# Altium PCB Backplane.PcbDoc (part 2 of 3)
Units mil, origin at the board's own origin, x right, y up, seen from the top; angles counter-clockwise.
Board outline 10300 x 6600 mil, 2 copper layers (Top Layer, Bottom Layer), stack 61.756 mil thick; 53 components, 149 nets, 1204 pads, 195 vias.
Unrouted connection lines stored in the file: 4.
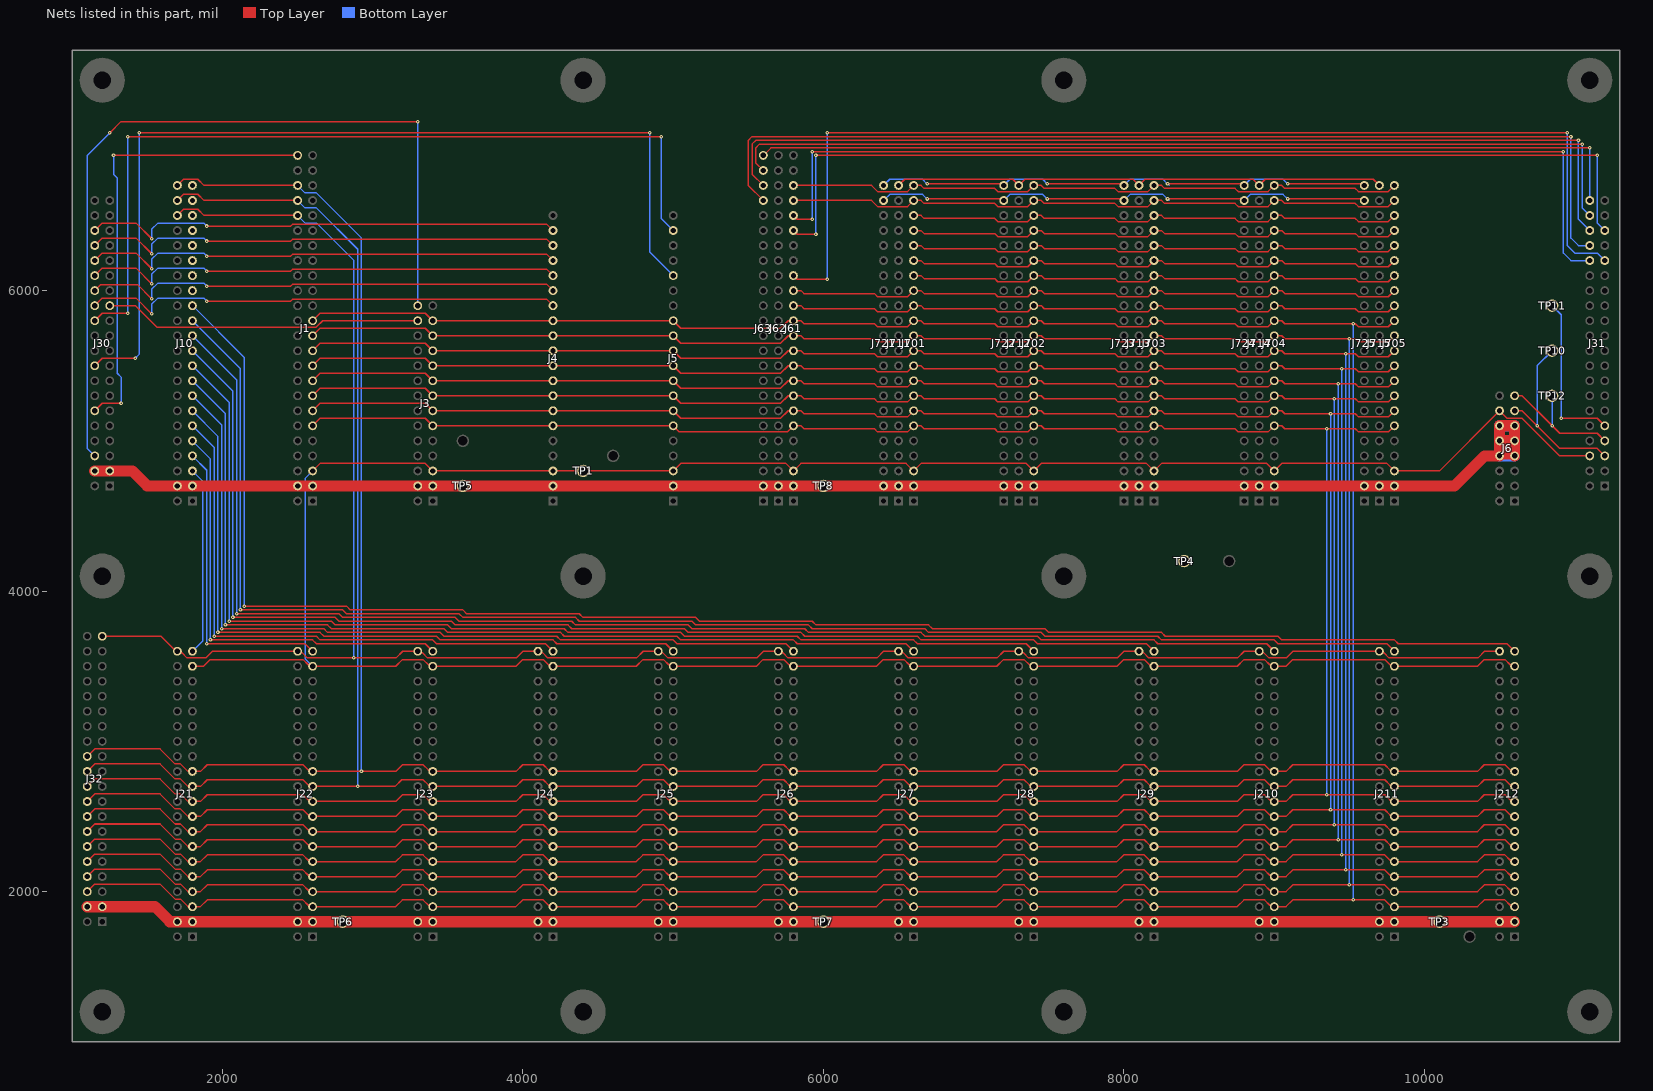
[diagram p2: the nets of this part, all layers, seen from the top]

## Via types
v1: diameter 24, hole 10, Top Layer to Bottom Layer, tented both sides, 195 vias

## Nets (pads, with @x,y where several pads share a name; then routed paths per layer and width w, separated by ;. In a path a pad name is that pad's centre, name@x,y a point inside that pad or via, vN(x,y) a via of type N, cw(c..) or ccw(c..) an arc to the next point about the centre after c; other vN are vias at no path point) (continued)
ADDR17: J1.40 J10.40 J21.40 J22.40 J23.40 J24.40 J25.40 J26.40 J27.40 J28.40 J29.40 J32.39 J210.40 J211.40 J212.40 | length 13724.9
  Top Layer w10: J32.39@1200,3700 1590,3700 1690,3600 J21.40@1700,3600 1709.39,3590.61 1729.39,3590.61 1764.53,3555.47 1889.07,3555.47 1933.6,3600 J22.40@2500,3600 2509.39,3590.61 2529.39,3590.61 2564.53,3555.47 3155.47,3555.47 3200,3600 J23.40@3300,3600 3309.39,3590.61 3329.39,3590.61 3364.53,3555.47 3955.47,3555.47 4000,3600 J24.40@4100,3600 4109.39,3590.61 4129.39,3590.61 4164.53,3555.47 4755.47,3555.47 4800,3600 J25.40@4900,3600 4909.39,3590.61 4929.39,3590.61 4964.53,3555.47 5555.47,3555.47 5600,3600 J26.40@5700,3600 5709.39,3590.61 5729.39,3590.61 5764.53,3555.47 6355.47,3555.47 6400,3600 J27.40@6500,3600 6509.39,3590.61 6529.39,3590.61 6564.53,3555.47 7155.47,3555.47 7200,3600 J28.40@7300,3600 7309.39,3590.61 7329.39,3590.61 7364.53,3555.47 7955.47,3555.47 8000,3600 J29.40@8100,3600 8109.39,3590.61 8129.39,3590.61 8164.53,3555.47 8755.47,3555.47 8800,3600 J210.40@8900,3600 8909.39,3590.61 8929.39,3590.61 8964.53,3555.47 9080.47,3555.47 9125,3600 J211.40@9700,3600 9709.39,3590.61 9729.39,3590.61 9764.53,3555.47 10355.47,3555.47 10400,3600 J212.40@10500,3600 ; J10.40@1700,6500 1741,6541 1836,6541 1877,6500 J1.40@2500,6500
  Bottom Layer w10: J1.40@2500,6500 2550,6450 2625,6450 2875,6200 v1(2875,3555.47)
ADDR18: J1.42 J10.42 J21.21 J22.21 J23.21 J24.21 J25.21 J26.21 J27.21 J28.21 J29.21 J32.22 J210.21 J211.21 J212.21 | length 14930.3
  Top Layer w10: J32.22@1100,2800 1150,2850 1585,2850 1685,2750 1720,2750 1770,2700 J21.21@1800,2700 1853.6,2700 1898.12,2744.53 ; J10.42@1700,6600 1741,6641 1836,6641 1877,6600 J1.42@2500,6600 ; 1900,2744.53 2535.47,2744.53 2570.61,2709.39 2590.61,2709.39 J22.21@2600,2700 v1(2900,2700) 3149.07,2700 3193.59,2744.53 3335.47,2744.53 3370.61,2709.39 3390.61,2709.39 J23.21@3400,2700 3953.6,2700 3998.12,2744.53 4135.47,2744.53 4170.61,2709.39 4190.61,2709.39 J24.21@4200,2700 4753.6,2700 4798.12,2744.53 4935.47,2744.53 4970.61,2709.39 4990.61,2709.39 J25.21@5000,2700 5553.6,2700 5598.12,2744.53 5735.47,2744.53 5770.61,2709.39 5790.61,2709.39 J26.21@5800,2700 6353.6,2700 6398.12,2744.53 6535.47,2744.53 6570.61,2709.39 6590.61,2709.39 J27.21@6600,2700 7153.6,2700 7198.12,2744.53 7335.47,2744.53 7370.61,2709.39 7390.61,2709.39 J28.21@7400,2700 7953.6,2700 7998.12,2744.53 8135.47,2744.53 8170.61,2709.39 8190.61,2709.39 J29.21@8200,2700 8753.6,2700 8798.12,2744.53 8935.47,2744.53 8970.61,2709.39 8990.61,2709.39 J210.21@9000,2700 9078.6,2700 9123.12,2744.53 9735.47,2744.53 9770.61,2709.39 9790.61,2709.39 J211.21@9800,2700 10353.6,2700 10398.12,2744.53 10535.47,2744.53 10570.61,2709.39 10590.61,2709.39 J212.21@10600,2700
  Bottom Layer w10: J1.42@2500,6600 2550,6550 2625,6550 2900,6275 v1(2900,2700)
ADDR19: J1.44 J10.44 J21.23 J22.23 J23.23 J24.23 J25.23 J26.23 J27.23 J28.23 J29.23 J32.24 J210.23 J211.23 J212.23 | length 14940.7
  Top Layer w10: J32.24@1100,2900 1150,2950 1585,2950 1685,2850 1720,2850 1770,2800 J21.23@1800,2800 1853.6,2800 1898.12,2844.53 ; J10.44@1700,6700 1741,6741 1836,6741 1877,6700 J1.44@2500,6700 ; 1900,2844.53 2535.47,2844.53 2570.61,2809.39 2590.61,2809.39 J22.23@2600,2800 v1(2925,2800) 3153.6,2800 3198.12,2844.53 3335.47,2844.53 3370.61,2809.39 3390.61,2809.39 J23.23@3400,2800 3953.6,2800 3998.12,2844.53 4135.47,2844.53 4170.61,2809.39 4190.61,2809.39 J24.23@4200,2800 4753.6,2800 4798.12,2844.53 4935.47,2844.53 4970.61,2809.39 4990.61,2809.39 J25.23@5000,2800 5553.6,2800 5598.12,2844.53 5735.47,2844.53 5770.61,2809.39 5790.61,2809.39 J26.23@5800,2800 6353.6,2800 6398.12,2844.53 6535.47,2844.53 6570.61,2809.39 6590.61,2809.39 J27.23@6600,2800 7153.6,2800 7198.12,2844.53 7335.47,2844.53 7370.61,2809.39 7390.61,2809.39 J28.23@7400,2800 7953.6,2800 7998.12,2844.53 8135.47,2844.53 8170.61,2809.39 8190.61,2809.39 J29.23@8200,2800 8753.6,2800 8798.12,2844.53 8935.47,2844.53 8970.61,2809.39 8990.61,2809.39 J210.23@9000,2800 9078.6,2800 9123.12,2844.53 9735.47,2844.53 9770.61,2809.39 9790.61,2809.39 J211.23@9800,2800 10353.6,2800 10398.12,2844.53 10535.47,2844.53 10570.61,2809.39 10590.61,2809.39 J212.23@10600,2800
  Bottom Layer w10: J1.44@2500,6700 2550,6650 2625,6650 2925,6350 v1(2925,2800)
AI#: J4.14 J30.26 | length 3225.6
  Top Layer w10: J30.26@1150,5900 1200,5950 1425,5950 v1(1530,5845) ; v1(1895,5930) 2455,5930 2466,5941 4159,5941 J4.14@4200,5900
  Bottom Layer w10: v1(1530,5845) 1530,5910 1570,5950 1875,5950 v1(1895,5930)
ALU0: J31.34 J63.21 | length 6747.5
  Top Layer w10: J63.21@5600,6600 5500,6700 5500,7000 5525,7025 v1(10975,7025)
  Bottom Layer w10: v1(10975,7025) 10975,6350 11025,6300 J31.34@11100,6300
ALU1: J31.36 J63.22 | length 6447.5
  Top Layer w10: J63.22@5600,6700 5525,6775 5525,6975 5550,7000 v1(11025,7000)
  Bottom Layer w10: v1(11025,7000) 11025,6475 J31.36@11100,6400
ALU2: J31.38 J63.23 | length 6176.8
  Top Layer w10: J63.23@5600,6800 5550,6850 5550,6950 5575,6975 v1(11050,6975)
  Bottom Layer w10: v1(11050,6975) 11050,6550 J31.38@11100,6500
ALU3: J31.40 J63.24 | length 5870.7
  Top Layer w10: J63.24@5600,6900 5650,6950 v1(11100,6950)
  Bottom Layer w10: J31.40@11100,6600 v1(11100,6950)
ALU_RFU16: J701.16 J702.16 J703.16 J704.16 J705.16 | length 3334.3
  Top Layer w10: J701.16@6600,6100 6650,6100 6670,6080 7140,6080 7160.53,6059.47 7359.47,6059.47 J702.16@7400,6100 7450,6100 7470,6080 7940,6080 7960.53,6059.47 8159.47,6059.47 J703.16@8200,6100 8250,6100 8270,6080 8740,6080 8760.53,6059.47 8959.47,6059.47 J704.16@9000,6100 9050,6100 9070,6080 9540,6080 9560.53,6059.47 9759.47,6059.47 J705.16@9800,6100
ALU_RFU17: J701.17 J702.17 J703.17 J704.17 J705.17 | length 3334.3
  Top Layer w10: J701.17@6600,6200 6650,6200 6670,6180 7140,6180 7160.53,6159.47 7359.47,6159.47 J702.17@7400,6200 7450,6200 7470,6180 7940,6180 7960.53,6159.47 8159.47,6159.47 J703.17@8200,6200 8250,6200 8270,6180 8740,6180 8760.53,6159.47 8959.47,6159.47 J704.17@9000,6200 9050,6200 9070,6180 9540,6180 9560.53,6159.47 9759.47,6159.47 J705.17@9800,6200
ALU_RFU18: J701.18 J702.18 J703.18 J704.18 J705.18 | length 3334.3
  Top Layer w10: J701.18@6600,6300 6650,6300 6670,6280 7140,6280 7160.53,6259.47 7359.47,6259.47 J702.18@7400,6300 7450,6300 7470,6280 7940,6280 7960.53,6259.47 8159.47,6259.47 J703.18@8200,6300 8250,6300 8270,6280 8740,6280 8760.53,6259.47 8959.47,6259.47 J704.18@9000,6300 9050,6300 9070,6280 9540,6280 9560.53,6259.47 9759.47,6259.47 J705.18@9800,6300
ALU_RFU19: J701.19 J702.19 J703.19 J704.19 J705.19 | length 3334.3
  Top Layer w10: J701.19@6600,6400 6650,6400 6670,6380 7140,6380 7160.53,6359.47 7359.47,6359.47 J702.19@7400,6400 7450,6400 7470,6380 7940,6380 7960.53,6359.47 8159.47,6359.47 J703.19@8200,6400 8250,6400 8270,6380 8740,6380 8760.53,6359.47 8959.47,6359.47 J704.19@9000,6400 9050,6400 9070,6380 9540,6380 9560.53,6359.47 9759.47,6359.47 J705.19@9800,6400
ALU_RFU20: J701.20 J702.20 J703.20 J704.20 J705.20 | length 3334.3
  Top Layer w10: J701.20@6600,6500 6650,6500 6670,6480 7140,6480 7160.53,6459.47 7359.47,6459.47 J702.20@7400,6500 7450,6500 7470,6480 7940,6480 7960.53,6459.47 8159.47,6459.47 J703.20@8200,6500 8250,6500 8270,6480 8740,6480 8760.53,6459.47 8959.47,6459.47 J704.20@9000,6500 9050,6500 9070,6480 9540,6480 9560.53,6459.47 9759.47,6459.47 J705.20@9800,6500
ALU_RFU21: J61.21 J701.21 J702.21 J703.21 J704.21 J705.21 | length 4167.9
  Top Layer w10: J61.21@5800,6600 6320,6600 6360.53,6559.47 6559.47,6559.47 J701.21@6600,6600 6650,6600 6670,6580 7140,6580 7160.53,6559.47 7359.47,6559.47 J702.21@7400,6600 7450,6600 7470,6580 7940,6580 7960.53,6559.47 8159.47,6559.47 J703.21@8200,6600 8250,6600 8270,6580 8740,6580 8760.53,6559.47 8959.47,6559.47 J704.21@9000,6600 9050,6600 9070,6580 9540,6580 9560.53,6559.47 9759.47,6559.47 J705.21@9800,6600
ALU_RFU22: J61.22 J701.22 J702.22 J703.22 J704.22 J705.22 | length 4167.9
  Top Layer w10: J61.22@5800,6700 6320,6700 6360.53,6659.47 6559.47,6659.47 J701.22@6600,6700 6650,6700 6670,6680 7140,6680 7160.53,6659.47 7359.47,6659.47 J702.22@7400,6700 7450,6700 7470,6680 7940,6680 7960.53,6659.47 8159.47,6659.47 J703.22@8200,6700 8250,6700 8270,6680 8740,6680 8760.53,6659.47 8959.47,6659.47 J704.22@9000,6700 9050,6700 9070,6680 9540,6680 9560.53,6659.47 9759.47,6659.47 J705.22@9800,6700
ALU_RFU44: J711.22 J712.22 J713.22 J714.22 J715.22 | length 3334.3
  Top Layer w10: J711.22@6500,6700 6540.53,6740.53 7259.47,6740.53 J712.22@7300,6700 7340.53,6740.53 8059.47,6740.53 J713.22@8100,6700 8140.53,6740.53 8859.47,6740.53 J714.22@8900,6700 8940.53,6740.53 9659.47,6740.53 J715.22@9700,6700
ALU_RFU65: J721.21 J722.21 J723.21 J724.21 J725.21 | length 3334.3
  Top Layer w10: v1(6690,6610) 7190,6610 J722.21@7200,6600 ; v1(7490,6610) 7990,6610 J723.21@8000,6600 ; v1(8290,6610) 8790,6610 J724.21@8800,6600 ; v1(9090,6610) 9590,6610 J725.21@9600,6600
  Bottom Layer w10: J721.21@6400,6600 6440.53,6640.53 6659.47,6640.53 v1(6690,6610) ; J722.21@7200,6600 7240.53,6640.53 7459.47,6640.53 v1(7490,6610) ; J723.21@8000,6600 8040.53,6640.53 8259.47,6640.53 v1(8290,6610) ; J724.21@8800,6600 8840.53,6640.53 9059.47,6640.53 v1(9090,6610)
ALU_RFU66: J721.22 J722.22 J723.22 J724.22 J725.22 | length 3334.3
  Top Layer w10: v1(6690,6710) 7190,6710 J722.22@7200,6700 ; v1(7490,6710) 7990,6710 J723.22@8000,6700 ; v1(8290,6710) 8790,6710 J724.22@8800,6700 ; v1(9090,6710) 9590,6710 J725.22@9600,6700
  Bottom Layer w10: J721.22@6400,6700 6440.53,6740.53 6659.47,6740.53 v1(6690,6710) ; J722.22@7200,6700 7240.53,6740.53 7459.47,6740.53 v1(7490,6710) ; J723.22@8000,6700 8040.53,6740.53 8259.47,6740.53 v1(8290,6710) ; J724.22@8800,6700 8840.53,6740.53 9059.47,6740.53 v1(9090,6710)
AO#: J4.17 J30.32 | length 3225.6
  Top Layer w10: J30.32@1150,6200 1200,6250 1425,6250 v1(1530,6145) ; v1(1895,6230) 2455,6230 2466,6241 4159,6241 J4.17@4200,6200
  Bottom Layer w10: v1(1530,6145) 1530,6210 1570,6250 1875,6250 v1(1895,6230)
AT#: J31.9 TP11.1 | length 1085.6
  Top Layer w10: v1(10910,5150) 11150,5150 J31.9@11200,5100
  Bottom Layer w10: TP11.1@10850,5900 10910,5840 v1(10910,5150)
BI#: J4.15 J30.28 | length 3217.4
  Top Layer w10: J30.28@1150,6000 1190,6040 1243.48,6040 cw(c1250,6000) 1256.52,6040 1435,6040 v1(1530,5945) ; v1(1895,6030) 2455,6030 2466,6041 4159,6041 J4.15@4200,6000
  Bottom Layer w10: v1(1530,5945) 1530,6010 1570,6050 1875,6050 v1(1895,6030)
BO#: J4.18 J30.34 | length 3225.6
  Top Layer w10: J30.34@1150,6300 1200,6350 1425,6350 v1(1530,6245) ; v1(1895,6330) 2455,6330 2466,6341 4159,6341 J4.18@4200,6300
  Bottom Layer w10: v1(1530,6245) 1530,6310 1570,6350 1875,6350 v1(1895,6330)
BUS0: J1.25 J3.25 J4.13 J5.13 J21.5 J22.5 J23.5 J24.5 J25.5 J26.5 J27.5 J28.5 J29.5 J32.6 J61.13 J210.5 J211.5 J212.5 J701.13 J702.13 J703.13 J704.13 J705.13 | length 21272.2
  Top Layer w10: J32.6@1100,2000 1150,2050 1585,2050 1685,1950 1720,1950 1770,1900 J21.5@1800,1900 1853.6,1900 1898.12,1944.53 ; 1900,1944.53 2535.47,1944.53 2570.61,1909.39 2590.61,1909.39 J22.5@2600,1900 3153.6,1900 3198.12,1944.53 3335.47,1944.53 3370.61,1909.39 3390.61,1909.39 J23.5@3400,1900 3953.6,1900 3998.12,1944.53 4135.47,1944.53 4170.61,1909.39 4190.61,1909.39 J24.5@4200,1900 4753.6,1900 4798.12,1944.53 4935.47,1944.53 4970.61,1909.39 4990.61,1909.39 J25.5@5000,1900 5553.6,1900 5598.12,1944.53 5735.47,1944.53 5770.61,1909.39 5790.61,1909.39 J26.5@5800,1900 6353.6,1900 6398.12,1944.53 6535.47,1944.53 6570.61,1909.39 6590.61,1909.39 J27.5@6600,1900 7153.6,1900 7198.12,1944.53 7335.47,1944.53 7370.61,1909.39 7390.61,1909.39 J28.5@7400,1900 7953.6,1900 7998.12,1944.53 8135.47,1944.53 8170.61,1909.39 8190.61,1909.39 J29.5@8200,1900 8753.6,1900 8798.12,1944.53 8935.47,1944.53 8970.61,1909.39 8990.61,1909.39 J210.5@9000,1900 9078.6,1900 9123.12,1944.53 v1(9525,1944.53) 9735.47,1944.53 9770.61,1909.39 9790.61,1909.39 J211.5@9800,1900 10353.6,1900 10398.12,1944.53 10535.47,1944.53 10570.61,1909.39 10590.61,1909.39 J212.5@10600,1900 ; J1.25@2600,5800 2650,5850 3350,5850 J3.25@3400,5800 J4.13@4200,5800 J5.13@5000,5800 5050,5750 5715,5750 5765,5800 J61.13@5800,5800 5850,5800 5870,5780 6340,5780 6360.53,5759.47 6559.47,5759.47 J701.13@6600,5800 6650,5800 6670,5780 7140,5780 7160.53,5759.47 7359.47,5759.47 J702.13@7400,5800 7450,5800 7470,5780 7940,5780 7960.53,5759.47 8159.47,5759.47 J703.13@8200,5800 8250,5800 8270,5780 8740,5780 8760.53,5759.47 8959.47,5759.47 J704.13@9000,5800 9050,5800 9070,5780 v1(9525,5780) 9540,5780 9560.53,5759.47 9759.47,5759.47 J705.13@9800,5800
  Bottom Layer w10: v1@9525,1945.22 v1(9525,5780)
BUS1: J1.23 J3.23 J4.12 J5.12 J21.7 J22.7 J23.7 J24.7 J25.7 J26.7 J27.7 J28.7 J29.7 J32.8 J61.12 J210.7 J211.7 J212.7 J701.12 J702.12 J703.12 J704.12 J705.12 | length 21072.2
  Top Layer w10: J32.8@1100,2100 1150,2150 1585,2150 1685,2050 1720,2050 1770,2000 J21.7@1800,2000 1853.6,2000 1898.12,2044.53 ; 1900,2044.53 2535.47,2044.53 2570.61,2009.39 2590.61,2009.39 J22.7@2600,2000 3153.6,2000 3198.12,2044.53 3335.47,2044.53 3370.61,2009.39 3390.61,2009.39 J23.7@3400,2000 3953.6,2000 3998.12,2044.53 4135.47,2044.53 4170.61,2009.39 4190.61,2009.39 J24.7@4200,2000 4753.6,2000 4798.12,2044.53 4935.47,2044.53 4970.61,2009.39 4990.61,2009.39 J25.7@5000,2000 5553.6,2000 5598.12,2044.53 5735.47,2044.53 5770.61,2009.39 5790.61,2009.39 J26.7@5800,2000 6353.6,2000 6398.12,2044.53 6535.47,2044.53 6570.61,2009.39 6590.61,2009.39 J27.7@6600,2000 7153.6,2000 7198.12,2044.53 7335.47,2044.53 7370.61,2009.39 7390.61,2009.39 J28.7@7400,2000 7953.6,2000 7998.12,2044.53 8135.47,2044.53 8170.61,2009.39 8190.61,2009.39 J29.7@8200,2000 8753.6,2000 8798.12,2044.53 8935.47,2044.53 8970.61,2009.39 8990.61,2009.39 J210.7@9000,2000 9078.6,2000 9123.12,2044.53 v1(9500,2044.53) 9735.47,2044.53 9770.61,2009.39 9790.61,2009.39 J211.7@9800,2000 10353.6,2000 10398.12,2044.53 10535.47,2044.53 10570.61,2009.39 10590.61,2009.39 J212.7@10600,2000 ; J1.23@2600,5700 2650,5750 3350,5750 J3.23@3400,5700 J4.12@4200,5700 J5.12@5000,5700 5050,5650 5715,5650 5765,5700 J61.12@5800,5700 5850,5700 5870,5680 6340,5680 6360.53,5659.47 6559.47,5659.47 J701.12@6600,5700 6650,5700 6670,5680 7140,5680 7160.53,5659.47 7359.47,5659.47 J702.12@7400,5700 7450,5700 7470,5680 7940,5680 7960.53,5659.47 8159.47,5659.47 J703.12@8200,5700 8250,5700 8270,5680 8740,5680 8760.53,5659.47 8959.47,5659.47 J704.12@9000,5700 9050,5700 9070,5680 v1(9500,5680) 9540,5680 9560.53,5659.47 9759.47,5659.47 J705.12@9800,5700
  Bottom Layer w10: v1@9500,2045.22 v1(9500,5680)
BUS2: J1.21 J3.21 J4.11 J5.11 J21.9 J22.9 J23.9 J24.9 J25.9 J26.9 J27.9 J28.9 J29.9 J32.10 J61.11 J210.9 J211.9 J212.9 J701.11 J702.11 J703.11 J704.11 J705.11 | length 20872.2
  Top Layer w10: J32.10@1100,2200 1150,2250 1585,2250 1685,2150 1720,2150 1770,2100 J21.9@1800,2100 1853.6,2100 1898.12,2144.53 ; 1900,2144.53 2535.47,2144.53 2570.61,2109.39 2590.61,2109.39 J22.9@2600,2100 3153.6,2100 3198.12,2144.53 3335.47,2144.53 3370.61,2109.39 3390.61,2109.39 J23.9@3400,2100 3953.6,2100 3998.12,2144.53 4135.47,2144.53 4170.61,2109.39 4190.61,2109.39 J24.9@4200,2100 4753.6,2100 4798.12,2144.53 4935.47,2144.53 4970.61,2109.39 4990.61,2109.39 J25.9@5000,2100 5553.6,2100 5598.12,2144.53 5735.47,2144.53 5770.61,2109.39 5790.61,2109.39 J26.9@5800,2100 6353.6,2100 6398.12,2144.53 6535.47,2144.53 6570.61,2109.39 6590.61,2109.39 J27.9@6600,2100 7153.6,2100 7198.12,2144.53 7335.47,2144.53 7370.61,2109.39 7390.61,2109.39 J28.9@7400,2100 7953.6,2100 7998.12,2144.53 8135.47,2144.53 8170.61,2109.39 8190.61,2109.39 J29.9@8200,2100 8753.6,2100 8798.12,2144.53 8935.47,2144.53 8970.61,2109.39 8990.61,2109.39 J210.9@9000,2100 9078.6,2100 9123.12,2144.53 v1(9475,2144.53) 9735.47,2144.53 9770.61,2109.39 9790.61,2109.39 J211.9@9800,2100 10353.6,2100 10398.12,2144.53 10535.47,2144.53 10570.61,2109.39 10590.61,2109.39 J212.9@10600,2100 ; J1.21@2600,5600 2650,5650 3350,5650 J3.21@3400,5600 J4.11@4200,5600 J5.11@5000,5600 5050,5550 5715,5550 5765,5600 J61.11@5800,5600 5850,5600 5870,5580 6340,5580 6360.53,5559.47 6559.47,5559.47 J701.11@6600,5600 6650,5600 6670,5580 7140,5580 7160.53,5559.47 7359.47,5559.47 J702.11@7400,5600 7450,5600 7470,5580 7940,5580 7960.53,5559.47 8159.47,5559.47 J703.11@8200,5600 8250,5600 8270,5580 8740,5580 8760.53,5559.47 8959.47,5559.47 J704.11@9000,5600 9050,5600 9070,5580 v1(9475,5580) 9540,5580 9560.53,5559.47 9759.47,5559.47 J705.11@9800,5600
  Bottom Layer w10: v1@9475,2145.22 v1(9475,5580)
BUS3: J1.19 J3.19 J4.10 J5.10 J21.11 J22.11 J23.11 J24.11 J25.11 J26.11 J27.11 J28.11 J29.11 J32.12 J61.10 J210.11 J211.11 J212.11 J701.10 J702.10 J703.10 J704.10 J705.10 | length 20672.2
  Top Layer w10: J32.12@1100,2300 1150,2350 1585,2350 1685,2250 1720,2250 1770,2200 J21.11@1800,2200 1853.6,2200 1898.12,2244.53 ; 1900,2244.53 2535.47,2244.53 2570.61,2209.39 2590.61,2209.39 J22.11@2600,2200 3153.6,2200 3198.12,2244.53 3335.47,2244.53 3370.61,2209.39 3390.61,2209.39 J23.11@3400,2200 3953.6,2200 3998.12,2244.53 4135.47,2244.53 4170.61,2209.39 4190.61,2209.39 J24.11@4200,2200 4753.6,2200 4798.12,2244.53 4935.47,2244.53 4970.61,2209.39 4990.61,2209.39 J25.11@5000,2200 5553.6,2200 5598.12,2244.53 5735.47,2244.53 5770.61,2209.39 5790.61,2209.39 J26.11@5800,2200 6353.6,2200 6398.12,2244.53 6535.47,2244.53 6570.61,2209.39 6590.61,2209.39 J27.11@6600,2200 7153.6,2200 7198.12,2244.53 7335.47,2244.53 7370.61,2209.39 7390.61,2209.39 J28.11@7400,2200 7953.6,2200 7998.12,2244.53 8135.47,2244.53 8170.61,2209.39 8190.61,2209.39 J29.11@8200,2200 8753.6,2200 8798.12,2244.53 8935.47,2244.53 8970.61,2209.39 8990.61,2209.39 J210.11@9000,2200 9078.6,2200 9123.12,2244.53 v1(9450,2244.53) 9735.47,2244.53 9770.61,2209.39 9790.61,2209.39 J211.11@9800,2200 10353.6,2200 10398.12,2244.53 10535.47,2244.53 10570.61,2209.39 10590.61,2209.39 J212.11@10600,2200 ; J1.19@2600,5500 2650,5550 3350,5550 J3.19@3400,5500 J4.10@4200,5500 J5.10@5000,5500 5050,5450 5715,5450 5765,5500 J61.10@5800,5500 5850,5500 5870,5480 6340,5480 6360.53,5459.47 6559.47,5459.47 J701.10@6600,5500 6650,5500 6670,5480 7140,5480 7160.53,5459.47 7359.47,5459.47 J702.10@7400,5500 7450,5500 7470,5480 7940,5480 7960.53,5459.47 8159.47,5459.47 J703.10@8200,5500 8250,5500 8270,5480 8740,5480 8760.53,5459.47 8959.47,5459.47 J704.10@9000,5500 9050,5500 9070,5480 v1(9450,5480) 9540,5480 9560.53,5459.47 9759.47,5459.47 J705.10@9800,5500
  Bottom Layer w10: v1@9450,2245.22 v1(9450,5480)
BUS4: J1.17 J3.17 J4.9 J5.9 J21.13 J22.13 J23.13 J24.13 J25.13 J26.13 J27.13 J28.13 J29.13 J32.14 J61.9 J210.13 J211.13 J212.13 J701.9 J702.9 J703.9 J704.9 J705.9 | length 20472.9
  Top Layer w10: J32.14@1100,2400 1150,2450 1585,2450 1685,2350 1720,2350 1770,2300 J21.13@1800,2300 1853.6,2300 1898.12,2344.53 ; 1900,2344.53 2535.47,2344.53 2570.61,2309.39 2590.61,2309.39 J22.13@2600,2300 3153.6,2300 3198.12,2344.53 3335.47,2344.53 3370.61,2309.39 3390.61,2309.39 J23.13@3400,2300 3953.6,2300 3998.12,2344.53 4135.47,2344.53 4170.61,2309.39 4190.61,2309.39 J24.13@4200,2300 4753.6,2300 4798.12,2344.53 4935.47,2344.53 4970.61,2309.39 4990.61,2309.39 J25.13@5000,2300 5553.6,2300 5598.12,2344.53 5735.47,2344.53 5770.61,2309.39 5790.61,2309.39 J26.13@5800,2300 6353.6,2300 6398.12,2344.53 6535.47,2344.53 6570.61,2309.39 6590.61,2309.39 J27.13@6600,2300 7153.6,2300 7198.12,2344.53 7335.47,2344.53 7370.61,2309.39 7390.61,2309.39 J28.13@7400,2300 7953.6,2300 7998.12,2344.53 8135.47,2344.53 8170.61,2309.39 8190.61,2309.39 J29.13@8200,2300 8753.6,2300 8798.12,2344.53 8935.47,2344.53 8970.61,2309.39 8990.61,2309.39 J210.13@9000,2300 9078.6,2300 9123.12,2344.53 v1(9425,2344.53) 9735.47,2344.53 9770.61,2309.39 9790.61,2309.39 J211.13@9800,2300 10353.6,2300 10398.12,2344.53 10535.47,2344.53 10570.61,2309.39 10590.61,2309.39 J212.13@10600,2300 ; J1.17@2600,5400 2650,5450 3350,5450 J3.17@3400,5400 J4.9@4200,5400 J5.9@5000,5400 5050,5350 5715,5350 5765,5400 J61.9@5800,5400 5850,5400 5870,5380 6340,5380 6360.53,5359.47 6559.47,5359.47 J701.9@6600,5400 6650,5400 6670,5380 7140,5380 7160.53,5359.47 7359.47,5359.47 J702.9@7400,5400 7450,5400 7470,5380 7940,5380 7960.53,5359.47 8159.47,5359.47 J703.9@8200,5400 8250,5400 8270,5380 8740,5380 8760.53,5359.47 8959.47,5359.47 J704.9@9000,5400 9050,5400 9070,5380 v1(9425,5380) 9540,5380 9560.53,5359.47 9759.47,5359.47 J705.9@9800,5400
  Bottom Layer w10: v1(9425,2344.53) v1(9425,5380)
BUS5: J1.15 J3.15 J4.8 J5.8 J21.15 J22.15 J23.15 J24.15 J25.15 J26.15 J27.15 J28.15 J29.15 J32.16 J61.8 J210.15 J211.15 J212.15 J701.8 J702.8 J703.8 J704.8 J705.8 | length 20270.3
  Top Layer w10: J32.16@1100,2500 1150,2550 1585,2550 1685,2450 1720,2450 1770,2400 J21.15@1800,2400 1853.6,2400 1898.12,2444.53 ; 1900,2444.53 2535.47,2444.53 2570.61,2409.39 2590.61,2409.39 J22.15@2600,2400 3153.6,2400 3198.12,2444.53 3335.47,2444.53 3370.61,2409.39 3390.61,2409.39 J23.15@3400,2400 3953.6,2400 3998.12,2444.53 4135.47,2444.53 4170.61,2409.39 4190.61,2409.39 J24.15@4200,2400 4753.6,2400 4798.12,2444.53 4935.47,2444.53 4970.61,2409.39 4990.61,2409.39 J25.15@5000,2400 5553.6,2400 5598.12,2444.53 5735.47,2444.53 5770.61,2409.39 5790.61,2409.39 J26.15@5800,2400 6353.6,2400 6398.12,2444.53 6535.47,2444.53 6570.61,2409.39 6590.61,2409.39 J27.15@6600,2400 7153.6,2400 7198.12,2444.53 7335.47,2444.53 7370.61,2409.39 7390.61,2409.39 J28.15@7400,2400 7953.6,2400 7998.12,2444.53 8135.47,2444.53 8170.61,2409.39 8190.61,2409.39 J29.15@8200,2400 8753.6,2400 8798.12,2444.53 8935.47,2444.53 8970.61,2409.39 8990.61,2409.39 J210.15@9000,2400 9078.6,2400 9123.12,2444.53 v1(9400,2444.53) 9735.47,2444.53 9770.61,2409.39 9790.61,2409.39 J211.15@9800,2400 10353.6,2400 10398.12,2444.53 10535.47,2444.53 10570.61,2409.39 10590.61,2409.39 J212.15@10600,2400 ; J1.15@2600,5300 2650,5350 3350,5350 J3.15@3400,5300 J4.8@4200,5300 J5.8@5000,5300 5050,5250 5715,5250 5765,5300 J61.8@5800,5300 5850,5300 5870,5280 6340,5280 6360.53,5259.47 6559.47,5259.47 J701.8@6600,5300 6650,5300 6670,5280 7140,5280 7160.53,5259.47 7359.47,5259.47 J702.8@7400,5300 7450,5300 7470,5280 7940,5280 7960.53,5259.47 8159.47,5259.47 J703.8@8200,5300 8250,5300 8270,5280 8740,5280 8760.53,5259.47 8959.47,5259.47 J704.8@9000,5300 9050,5300 9070,5280 v1(9400,5280) 9540,5280 9560.53,5259.47 9759.47,5259.47 J705.8@9800,5300
  Bottom Layer w10: v1@9400,2447.11 v1(9400,5280)
BUS6: J1.13 J3.13 J4.7 J5.7 J21.17 J22.17 J23.17 J24.17 J25.17 J26.17 J27.17 J28.17 J29.17 J32.18 J61.7 J210.17 J211.17 J212.17 J701.7 J702.7 J703.7 J704.7 J705.7 | length 20072.2
  Top Layer w10: J32.18@1100,2600 1150,2650 1585,2650 1685,2550 1720,2550 1770,2500 J21.17@1800,2500 1853.6,2500 1898.12,2544.53 ; 1900,2544.53 2535.47,2544.53 2570.61,2509.39 2590.61,2509.39 J22.17@2600,2500 3153.6,2500 3198.12,2544.53 3335.47,2544.53 3370.61,2509.39 3390.61,2509.39 J23.17@3400,2500 3953.6,2500 3998.12,2544.53 4135.47,2544.53 4170.61,2509.39 4190.61,2509.39 J24.17@4200,2500 4753.6,2500 4798.12,2544.53 4935.47,2544.53 4970.61,2509.39 4990.61,2509.39 J25.17@5000,2500 5553.6,2500 5598.12,2544.53 5735.47,2544.53 5770.61,2509.39 5790.61,2509.39 J26.17@5800,2500 6353.6,2500 6398.12,2544.53 6535.47,2544.53 6570.61,2509.39 6590.61,2509.39 J27.17@6600,2500 7153.6,2500 7198.12,2544.53 7335.47,2544.53 7370.61,2509.39 7390.61,2509.39 J28.17@7400,2500 7953.6,2500 7998.12,2544.53 8135.47,2544.53 8170.61,2509.39 8190.61,2509.39 J29.17@8200,2500 8753.6,2500 8798.12,2544.53 8935.47,2544.53 8970.61,2509.39 8990.61,2509.39 J210.17@9000,2500 9078.6,2500 9123.12,2544.53 v1(9375,2544.53) 9735.47,2544.53 9770.61,2509.39 9790.61,2509.39 J211.17@9800,2500 10353.6,2500 10398.12,2544.53 10535.47,2544.53 10570.61,2509.39 10590.61,2509.39 J212.17@10600,2500 ; J1.13@2600,5200 2650,5250 3350,5250 J3.13@3400,5200 J4.7@4200,5200 J5.7@5000,5200 5050,5150 5715,5150 5765,5200 J61.7@5800,5200 5850,5200 5870,5180 6340,5180 6360.53,5159.47 6559.47,5159.47 J701.7@6600,5200 6650,5200 6670,5180 7140,5180 7160.53,5159.47 7359.47,5159.47 J702.7@7400,5200 7450,5200 7470,5180 7940,5180 7960.53,5159.47 8159.47,5159.47 J703.7@8200,5200 8250,5200 8270,5180 8740,5180 8760.53,5159.47 8959.47,5159.47 J704.7@9000,5200 9050,5200 9070,5180 v1(9375,5180) 9540,5180 9560.53,5159.47 9759.47,5159.47 J705.7@9800,5200
  Bottom Layer w10: v1@9375,2545.22 v1(9375,5180)
BUS7: J1.11 J3.11 J4.6 J5.6 J21.19 J22.19 J23.19 J24.19 J25.19 J26.19 J27.19 J28.19 J29.19 J32.20 J61.6 J210.19 J211.19 J212.19 J701.6 J702.6 J703.6 J704.6 J705.6 | length 19864.4
  Top Layer w10: J32.20@1100,2700 1150,2750 1585,2750 1685,2650 1720,2650 1770,2600 J21.19@1800,2600 1853.6,2600 1898.12,2644.53 ; 1900,2644.53 2535.47,2644.53 2570.61,2609.39 2590.61,2609.39 J22.19@2600,2600 3153.6,2600 3198.12,2644.53 3335.47,2644.53 3370.61,2609.39 3390.61,2609.39 J23.19@3400,2600 3953.6,2600 3998.12,2644.53 4135.47,2644.53 4170.61,2609.39 4190.61,2609.39 J24.19@4200,2600 4753.6,2600 4798.12,2644.53 4935.47,2644.53 4970.61,2609.39 4990.61,2609.39 J25.19@5000,2600 5553.6,2600 5598.12,2644.53 5735.47,2644.53 5770.61,2609.39 5790.61,2609.39 J26.19@5800,2600 6353.6,2600 6398.12,2644.53 6535.47,2644.53 6570.61,2609.39 6590.61,2609.39 J27.19@6600,2600 7153.6,2600 7198.12,2644.53 7335.47,2644.53 7370.61,2609.39 7390.61,2609.39 J28.19@7400,2600 7953.6,2600 7998.12,2644.53 8135.47,2644.53 8170.61,2609.39 8190.61,2609.39 J29.19@8200,2600 8753.6,2600 8798.12,2644.53 8935.47,2644.53 8970.61,2609.39 8990.61,2609.39 J210.19@9000,2600 9078.6,2600 9123.12,2644.53 v1(9350,2644.53) 9735.47,2644.53 9770.61,2609.39 9790.61,2609.39 J211.19@9800,2600 10353.6,2600 10398.12,2644.53 10535.47,2644.53 10570.61,2609.39 10590.61,2609.39 J212.19@10600,2600 ; J1.11@2600,5100 2650,5150 3350,5150 J3.11@3400,5100 J4.6@4200,5100 J5.6@5000,5100 5040.53,5059.47 5759.47,5059.47 J61.6@5800,5100 5850,5100 5870,5080 6340,5080 6360.53,5059.47 6559.47,5059.47 J701.6@6600,5100 6650,5100 6670,5080 7140,5080 7160.53,5059.47 7359.47,5059.47 J702.6@7400,5100 7450,5100 7470,5080 7940,5080 7960.53,5059.47 8159.47,5059.47 J703.6@8200,5100 8250,5100 8270,5080 8740,5080 8760.53,5059.47 8959.47,5059.47 J704.6@9000,5100 9050,5100 9070,5080 v1(9350,5080) 9540,5080 9560.53,5059.47 9759.47,5059.47 J705.6@9800,5100
  Bottom Layer w10: v1@9350,2645.22 v1(9350,5080)
CE#: J3.26 J30.25 | length 2127
  Top Layer w10: J30.25@1250,5900 1420,5900 1563,5757 2624,5757 2667,5800 J3.26@3300,5800
CLK: J1.5 J3.5 J4.3 J5.3 J6.14 J21.37 J22.37 J23.37 J24.37 J25.37 J26.37 J27.37 J28.37 J29.37 J31.6 J61.3 J210.37 J211.37 J212.37 J701.3 J702.3 J703.3 J704.3 J705.3 TP1.1 | length 19627.1
  Top Layer w10: J21.37@1800,3500 1873.6,3500 1918.12,3544.53 2535.47,3544.53 2570.61,3509.39 2590.61,3509.39 J22.37@2600,3500 3153.6,3500 3198.12,3544.53 3335.47,3544.53 3370.61,3509.39 3390.61,3509.39 J23.37@3400,3500 3953.6,3500 3998.12,3544.53 4135.47,3544.53 4170.61,3509.39 4190.61,3509.39 J24.37@4200,3500 4753.6,3500 4798.12,3544.53 4935.47,3544.53 4970.61,3509.39 4990.61,3509.39 J25.37@5000,3500 5553.6,3500 5598.12,3544.53 5735.47,3544.53 5770.61,3509.39 5790.61,3509.39 J26.37@5800,3500 6353.6,3500 6398.12,3544.53 6535.47,3544.53 6570.61,3509.39 6590.61,3509.39 J27.37@6600,3500 7153.6,3500 7198.12,3544.53 7335.47,3544.53 7370.61,3509.39 7390.61,3509.39 J28.37@7400,3500 7953.6,3500 7998.12,3544.53 8135.47,3544.53 8170.61,3509.39 8190.61,3509.39 J29.37@8200,3500 8753.6,3500 8798.12,3544.53 8935.47,3544.53 8970.61,3509.39 8990.61,3509.39 J210.37@9000,3500 9078.6,3500 9123.12,3544.53 9735.47,3544.53 9770.61,3509.39 9790.61,3509.39 J211.37@9800,3500 10353.6,3500 10398.12,3544.53 10535.47,3544.53 10570.61,3509.39 10590.61,3509.39 J212.37@10600,3500 ; J1.5@2600,4800 2650,4850 3350,4850 J3.5@3400,4800 J4.3@4200,4800 TP1.1@4400,4800 J5.3@5000,4800 5050,4850 5750,4850 J61.3@5800,4800 5850,4850 6550,4850 J701.3@6600,4800 6650,4850 7350,4850 J702.3@7400,4800 7450,4850 8150,4850 J703.3@8200,4800 8250,4850 8950,4850 J704.3@9000,4800 9050,4850 9750,4850 J705.3@9800,4800 10100,4800 J6.14@10500,5200 10550,5150 10650,5150 10900,4900 J31.6@11100,4900
  Bottom Layer w10: J22.37@2600,3500 2550,3550 2550,4750 J1.5@2600,4800
CO: J31.31 J61.16 | length 7176.8
  Top Layer w10: J61.16@5800,6100 5825,6075 v1(6025,6075) ; v1(6025,7050) v1(10950,7050)
  Bottom Layer w10: v1(6025,6075) v1(6025,7050) ; v1(10950,7050) 10950,6300 11000,6250 11150,6250 J31.31@11200,6200
CO_IMM: J61.14 J701.14 J702.14 J703.14 J704.14 J705.14 | length 4167.9
  Top Layer w10: J61.14@5800,5900 5850,5900 5870,5880 6340,5880 6360.53,5859.47 6559.47,5859.47 J701.14@6600,5900 6650,5900 6670,5880 7140,5880 7160.53,5859.47 7359.47,5859.47 J702.14@7400,5900 7450,5900 7470,5880 7940,5880 7960.53,5859.47 8159.47,5859.47 J703.14@8200,5900 8250,5900 8270,5880 8740,5880 8760.53,5859.47 8959.47,5859.47 J704.14@9000,5900 9050,5900 9070,5880 9540,5880 9560.53,5859.47 9759.47,5859.47 J705.14@9800,5900
DBG: J6.15 J31.7 TP12.1 | length 924.3
  Top Layer w10: J6.15@10600,5300 10650,5300 v1(10850,5100) 10900,5050 11150,5050 J31.7@11200,5000
  Bottom Layer w10: v1(10850,5100) TP12.1@10850,5300
DI#: J5.16 J30.18 | length 6215.3
  Top Layer w10: J30.18@1150,5500 1200,5550 v1(1420,5550) ; v1(1445,7050) v1(4845,7050)
  Bottom Layer w10: v1(1420,5550) 1445,5575 v1(1445,7050) ; v1(4845,7050) 4845,6255 J5.16@5000,6100
DO#: J5.19 J30.24 | length 5629.5
  Top Layer w10: J30.24@1150,5800 1200,5850 v1(1370,5850) ; v1(1370,7025) v1(4920,7025)
  Bottom Layer w10: v1(1370,5850) v1(1370,7025) ; v1(4920,7025) 4923,7025 4924,7024 4921,7021 4920,7021 4920,6480 J5.19@5000,6400
DS#: J1.48 J30.12 | length 3091.4
  Top Layer w10: J30.12@1150,5200 1200,5250 v1(1325,5250) ; v1(1275,6900) J1.48@2500,6900
  Bottom Layer w10: v1(1275,6900) 1275,6775 1300,6750 1300,5450 1325,5425 v1(1325,5250)
EN1: J10.5 J21.39 | length 1258
  Bottom Layer w10: J21.39@1800,3600 1870,3670 1870,4730 J10.5@1800,4800
EN2: J10.7 J22.39 | length 2015.1
  Top Layer w10: v1(1895,3650) 2550,3650 J22.39@2600,3600
  Bottom Layer w10: J10.7@1800,4900 1895,4805 v1(1895,3650)
EN3: J10.9 J23.39 | length 2885.8
  Top Layer w10: v1(1920,3675) 2600,3675 2625,3650 3350,3650 J23.39@3400,3600
  Bottom Layer w10: J10.9@1800,5000 1920,4880 v1(1920,3675)
EN4: J10.11 J24.39 | length 3756.5
  Top Layer w10: v1(1945,3700) 2625,3700 2650,3675 3400,3675 3425,3650 4150,3650 J24.39@4200,3600
  Bottom Layer w10: J10.11@1800,5100 1945,4955 v1(1945,3700)
EN5: J10.13 J25.39 | length 4627.2
  Top Layer w10: v1(1970,3725) 2650,3725 2675,3700 3425,3700 3450,3675 4200,3675 4225,3650 4950,3650 J25.39@5000,3600
  Bottom Layer w10: J10.13@1800,5200 1970,5030 v1(1970,3725)
EN6: J10.15 J26.39 | length 5497.9
  Top Layer w10: v1(1995,3750) 2675,3750 2700,3725 3450,3725 3475,3700 4225,3700 4250,3675 5000,3675 5025,3650 5750,3650 J26.39@5800,3600
  Bottom Layer w10: J10.15@1800,5300 1995,5105 v1(1995,3750)
EN7: J10.17 J27.39 | length 6368.6
  Top Layer w10: v1(2020,3775) 2700,3775 2725,3750 3475,3750 3500,3725 4250,3725 4275,3700 5025,3700 5050,3675 5800,3675 5825,3650 6550,3650 J27.39@6600,3600
  Bottom Layer w10: J10.17@1800,5400 2020,5180 v1(2020,3775)
EN8: J10.19 J28.39 | length 7239.3
  Top Layer w10: v1(2045,3800) 2725,3800 2750,3775 3500,3775 3525,3750 4275,3750 4300,3725 5050,3725 5075,3700 5825,3700 5850,3675 6600,3675 6625,3650 7350,3650 J28.39@7400,3600
  Bottom Layer w10: J10.19@1800,5500 2045,5255 v1(2045,3800)
EN9: J10.21 J29.39 | length 8110
  Top Layer w10: v1(2070,3825) 2750,3825 2775,3800 3525,3800 3550,3775 4300,3775 4325,3750 5075,3750 5100,3725 5850,3725 5875,3700 6625,3700 6650,3675 7400,3675 7425,3650 8150,3650 J29.39@8200,3600
  Bottom Layer w10: J10.21@1800,5600 2070,5330 v1(2070,3825)
EN10: J10.23 J210.39 | length 8980.7
  Top Layer w10: v1(2095,3850) 2775,3850 2800,3825 3550,3825 3575,3800 4325,3800 4350,3775 5100,3775 5125,3750 5875,3750 5900,3725 6650,3725 6675,3700 7425,3700 7450,3675 8200,3675 8225,3650 8950,3650 J210.39@9000,3600
  Bottom Layer w10: J10.23@1800,5700 2095,5405 v1(2095,3850)
EN11: J10.25 J211.39 | length 9851.5
  Top Layer w10: v1(2120,3875) 2800,3875 2825,3850 3575,3850 3600,3825 4350,3825 4375,3800 5125,3800 5150,3775 5900,3775 5925,3750 6675,3750 6700,3725 7450,3725 7475,3700 8225,3700 8250,3675 9000,3675 9025,3650 9750,3650 J211.39@9800,3600
  Bottom Layer w10: J10.25@1800,5800 2120,5480 v1(2120,3875)
EN12: J10.27 J212.39 | length 10722.2
  Top Layer w10: v1(2145,3900) 2825,3900 2850,3875 3600,3875 3625,3850 4375,3850 4400,3825 5150,3825 5175,3800 5925,3800 5950,3775 6700,3775 6725,3750 7475,3750 7500,3725 8250,3725 8275,3700 9025,3700 9050,3675 9800,3675 9825,3650 10550,3650 J212.39@10600,3600
  Bottom Layer w10: J10.27@1800,5900 2145,5555 v1(2145,3900)
EN13: J10.29
EN14: J10.31
EN15: J10.33
EN16: J10.35
EN17: J10.37
EN18: J10.39
EN19: J10.41
EN20: J10.43
F4: J31.35 J61.19 | length 6406.1
  Top Layer w10: J61.19@5800,6400 5825,6375 v1(5950,6375) ; v1(5950,6900) v1(11150,6900)
  Bottom Layer w10: v1(5950,6375) v1(5950,6900) ; v1(11150,6900) 11150,6450 J31.35@11200,6400
F4_IMM: J61.15 J701.15 J702.15 J703.15 J704.15 J705.15 | length 4167.9
  Top Layer w10: J61.15@5800,6000 5850,6000 5870,5980 6340,5980 6360.53,5959.47 6559.47,5959.47 J701.15@6600,6000 6650,6000 6670,5980 7140,5980 7160.53,5959.47 7359.47,5959.47 J702.15@7400,6000 7450,6000 7470,5980 7940,5980 7960.53,5959.47 8159.47,5959.47 J703.15@8200,6000 8250,6000 8270,5980 8740,5980 8760.53,5959.47 8959.47,5959.47 J704.15@9000,6000 9050,6000 9070,5980 9540,5980 9560.53,5959.47 9759.47,5959.47 J705.15@9800,6000
FI#: J31.32 J61.20 | length 6456.1
  Top Layer w10: J61.20@5800,6500 5825,6475 v1(5925,6475) ; v1(5925,6925) v1(10925,6925)
  Bottom Layer w10: v1(5925,6475) v1(5925,6925) ; v1(10925,6925) 10925,6250 10975,6200 J31.32@11100,6200
GND: J1.3 J1.4 J3.3 J3.4 J4.2 J5.2 J6.7 J6.8 J6.9 J6.10 J6.11 J6.12 J10.3 J10.4 J21.3 J21.4 J22.3 J22.4 J23.3 J23.4 J24.3 J24.4 J25.3 J25.4 J26.3 J26.4 J27.3 J27.4 J28.3 J28.4 J29.3 J29.4 J30.3 J30.4 J32.3 J32.4 J61.2 J62.2 J63.2 J210.3 J210.4 J211.3 J211.4 J212.3 J212.4 J701.2 J702.2 J703.2 J704.2 J705.2 J711.2 J712.2 J713.2 J714.2 J715.2 J721.2 J722.2 J723.2 J724.2 J725.2 TP3.1 TP4.1 TP5.1 TP6.1 TP7.1 TP8.1 | length 20528.1
  Top Layer w75: J32.4@1100,1900 J32.3@1200,1900 1550,1900 1650,1800 J21.4@1700,1800 J21.3@1800,1800 J22.4@2500,1800 J22.3@2600,1800 TP6.1@2800,1800 J23.4@3300,1800 J23.3@3400,1800 J24.4@4100,1800 J24.3@4200,1800 J25.4@4900,1800 J25.3@5000,1800 J26.4@5700,1800 J26.3@5800,1800 TP7.1@6000,1800 J27.4@6500,1800 J27.3@6600,1800 J28.4@7300,1800 J28.3@7400,1800 J29.4@8100,1800 J29.3@8200,1800 J210.4@8900,1800 J210.3@9000,1800 J211.4@9700,1800 J211.3@9800,1800 TP3.1@10100,1800 J212.4@10500,1800 J212.3@10600,1800 ; J30.4@1150,4800 J30.3@1250,4800 1400,4800 1500,4700 J10.4@1700,4700 J10.3@1800,4700 J1.4@2500,4700 J1.3@2600,4700 J3.4@3300,4700 J3.3@3400,4700 TP5.1@3600,4700 ; 3500,4700 TP5.1@3600,4700 ; TP5.1@3600,4700 J5.2@5000,4700 5500,4700 J63.2@5600,4700 J62.2@5700,4700 J61.2@5800,4700 TP8.1@6000,4700 J721.2@6400,4700 J711.2@6500,4700 J701.2@6600,4700 J722.2@7200,4700 J712.2@7300,4700 J702.2@7400,4700 J723.2@8000,4700 J713.2@8100,4700 J703.2@8200,4700 J724.2@8800,4700 J714.2@8900,4700 J704.2@9000,4700 J725.2@9600,4700 J715.2@9700,4700 J705.2@9800,4700 10200,4700 10400,4900 J6.8@10500,4900 ; J6.8@10500,4900 10515,4915 10585,4915 J6.7@10600,4900 J6.9@10600,5000 ; J6.8@10500,4900 J6.10@10500,5000 ; J6.10@10500,5000 J6.9@10600,5000 ; J6.10@10500,5000 J6.12@10500,5100 J6.11@10600,5100 J6.9@10600,5000
  Bottom Layer w75: J6.10@10500,5000 J6.8@10500,4900 J6.7@10600,4900 J6.9@10600,5000 ; J6.10@10500,5000 J6.12@10500,5100 J6.11@10600,5100 J6.9@10600,5000 ; J6.10@10500,5000 J6.9@10600,5000
HI#: J4.16 J30.30 | length 3225.6
  Top Layer w10: J30.30@1150,6100 1200,6150 1425,6150 v1(1530,6045) ; v1(1895,6130) 2455,6130 2466,6141 4159,6141 J4.16@4200,6100
  Bottom Layer w10: v1(1530,6045) 1530,6110 1570,6150 1875,6150 v1(1895,6130)
HO#: J4.19 J30.36 | length 3225.6
  Top Layer w10: J30.36@1150,6400 1200,6450 1425,6450 v1(1530,6345) ; v1(1895,6430) 2455,6430 2466,6441 4159,6441 J4.19@4200,6400
  Bottom Layer w10: v1(1530,6345) 1530,6410 1570,6450 1875,6450 v1(1895,6430)
HT#: J6.13 J31.5 TP10.1 | length 1265.7
  Top Layer w10: J6.13@10600,5200 10650,5200 v1(10750,5100) 10900,4950 11150,4950 J31.5@11200,4900
  Bottom Layer w10: v1(10750,5100) 10750,5500 TP10.1@10850,5600
II#: J3.28 J30.6 | length 5538.9
  Top Layer w10: v1(1250,7050) 1325,7125 v1(3300,7125)
  Bottom Layer w10: J30.6@1150,4900 1100,4950 1100,6900 v1(1250,7050) ; J3.28@3300,5900 v1(3300,7125)